# EAGLE board statie meteo (modul I) (EAGLE 7.5.0)
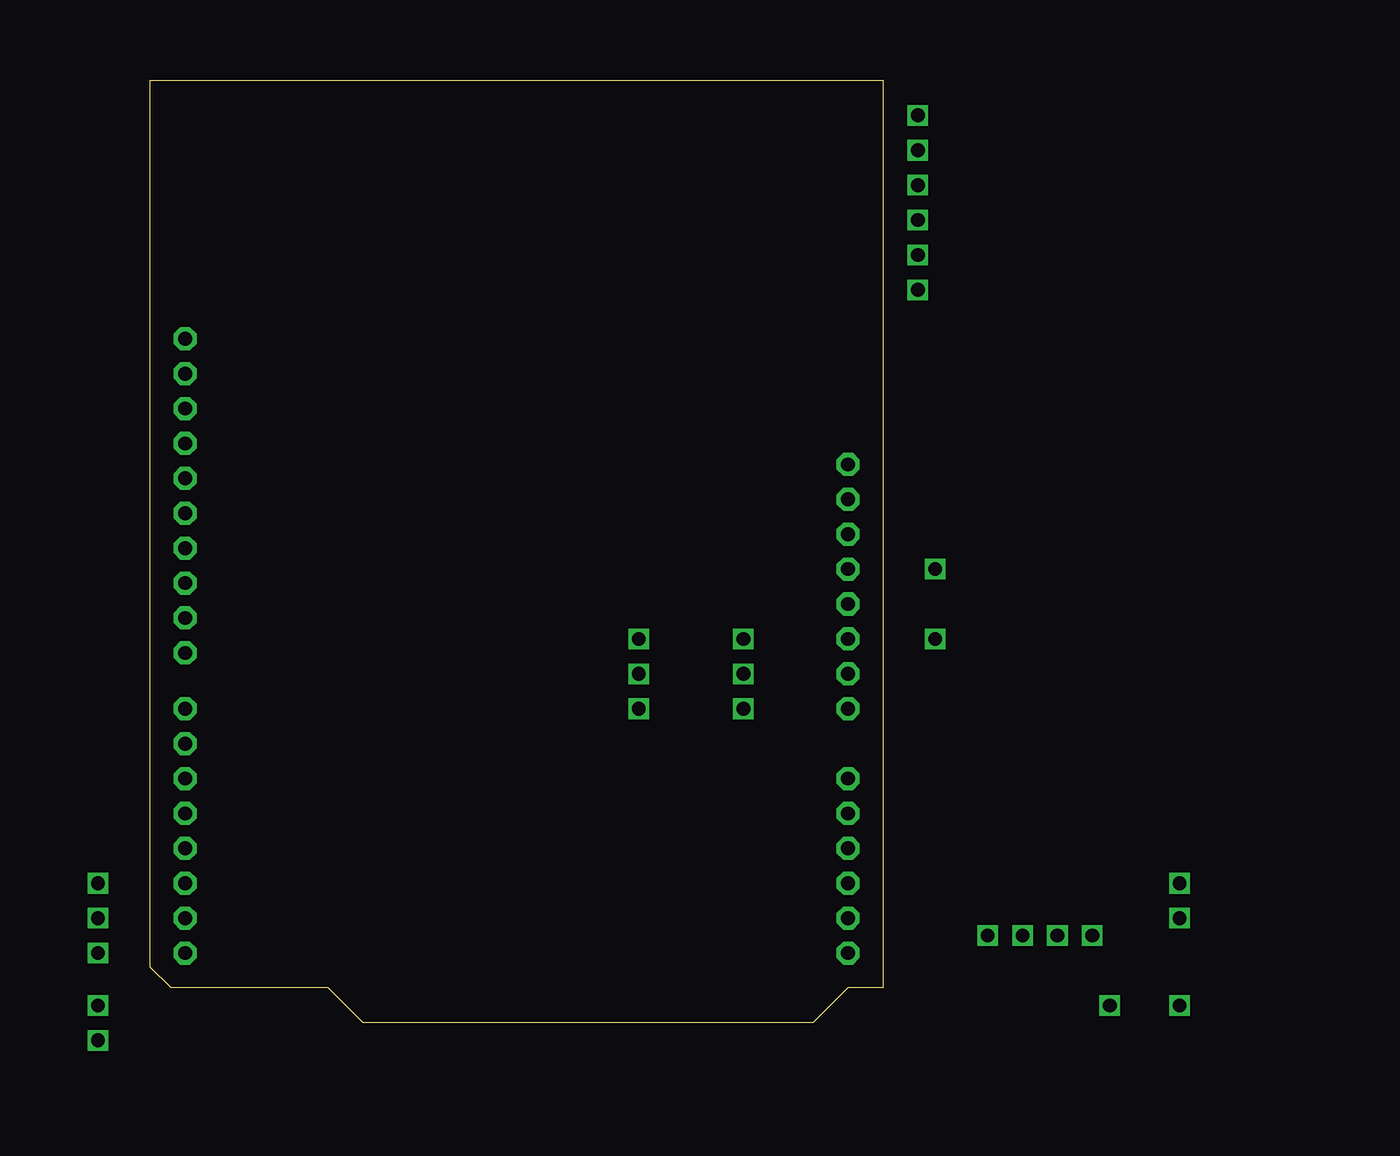
[diagram p0: board, top side]
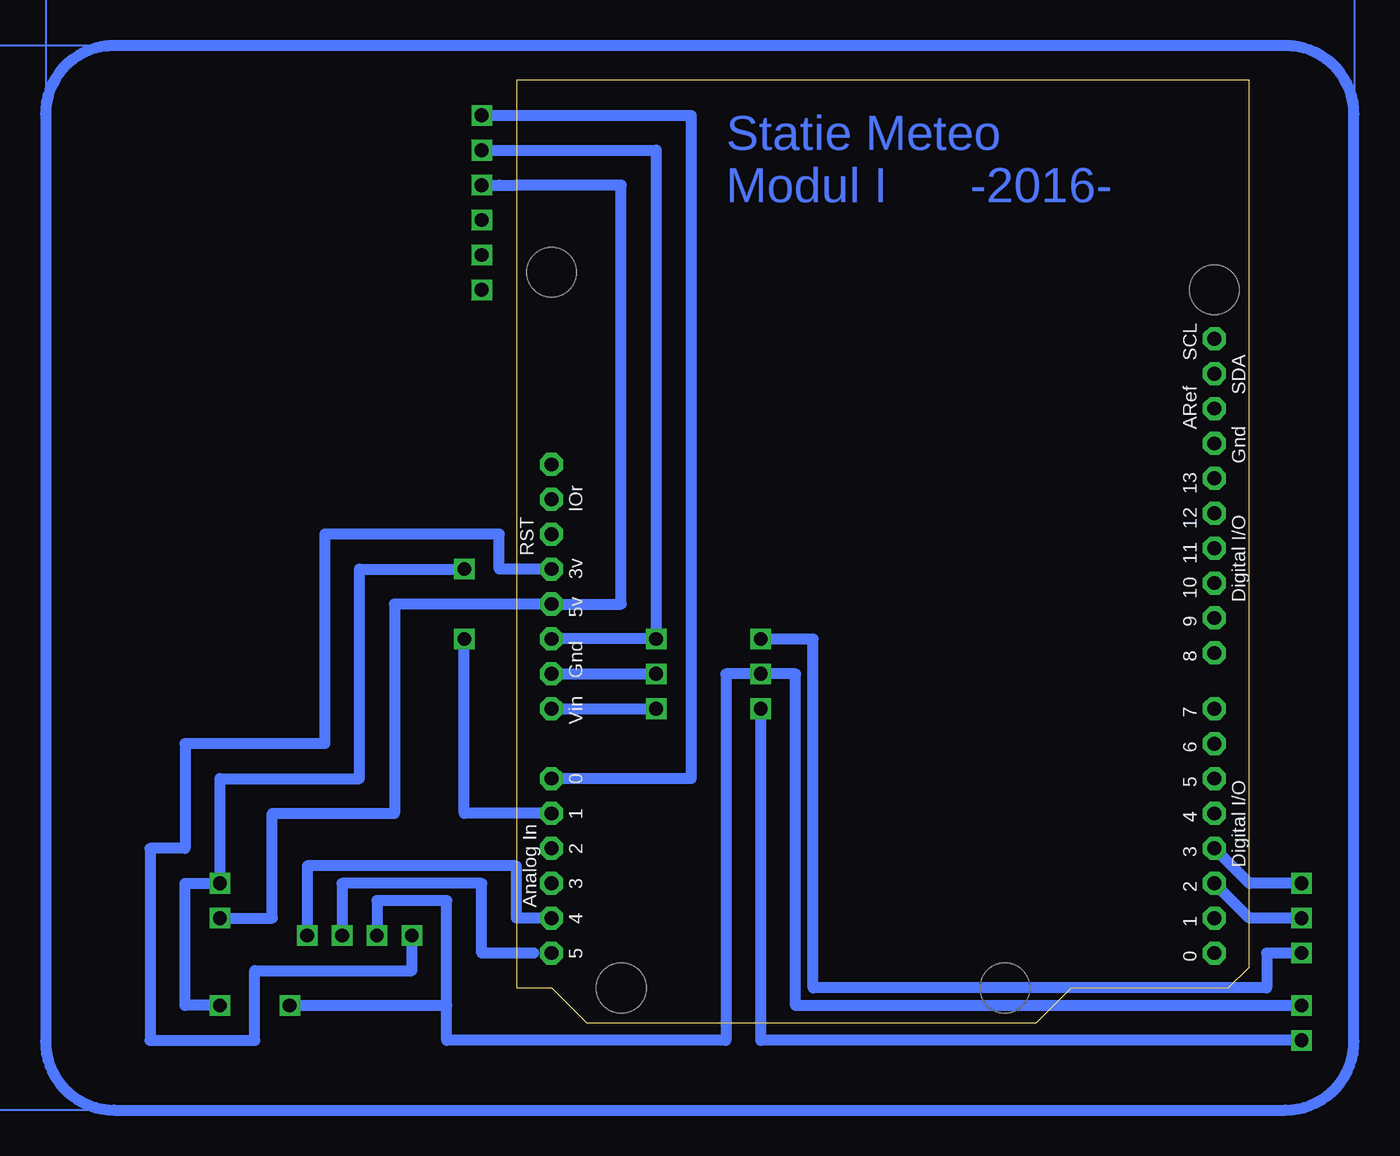
[diagram p1: board, bottom side, seen from below]

Size 53.34 x 68.58 mm. Coordinates in mm from the lower left corner, seen from the top.
Copper layers (1*16): Top 0.035mm / dielectric 1.5mm / Bottom 0.035mm
Design rules "default": minimum track width 10mil, minimum drill 24mil, track to track 8mil, track to pad 8mil, pad to pad 8mil, via to via 8mil, smd to smd 8mil, copper to edge 40mil, drill to drill 8mil, minimum pad ring 10mil, minimum via ring 8mil, stop-mask expansion 4mil, vias tented up to drill 0mil, thermal gap 10mil

## Footprints (pad centres in the part's own frame; a part is rotated, then mirrored left to right if it is on the bottom)
ARDUINOR3 = drill 1 pad 1.676 octagon: 3V 35.56,2.54; 5V 38.1,2.54; A0 50.8,2.54; A1 53.34,2.54; A2 55.88,2.54; A3 58.42,2.54; A4 60.96,2.54; A5 63.5,2.54; AREF 23.876,50.8; D0 63.5,50.8; D1 60.96,50.8; D2 58.42,50.8; D3 55.88,50.8; D4 53.34,50.8; D5 50.8,50.8; D6 48.26,50.8; D7 45.72,50.8; D8 41.656,50.8; D9 39.116,50.8; D10 36.576,50.8; D11 34.036,50.8; D12 31.496,50.8; D13 28.956,50.8; GND 26.416,50.8; GND1 43.18,2.54; GND2 40.64,2.54; IOREF 30.48,2.54; RESERVED 27.94,2.54; RESET 33.02,2.54; SCL 18.796,50.8; SDA 21.336,50.8; VIN 45.72,2.54

## Placement (x,y rotation side)
E$1  [ARDUINOR3]  53.34,68.58 270 bottom

## Library data of the parts
E$1 = adafruit

## Nets
S$1: E$1.A1
S$4: E$1.A4
S$6: E$1.3V
S$11: E$1.D2
S$12: E$1.D3
S$16: E$1.5V
S$17: E$1.GND2
S$18: E$1.A0
S$19: E$1.VIN
S$21: E$1.GND1

## Tracks (layer width: path | path; a pad name or v marks a point on that pad's centre or on a via)
S$1  (via drill 1)
  Bottom 0.813: E$1.A1 57.15,15.24 v57.15,27.94
S$2  (via drill 1)
  Bottom 0.813: 52.07,5.08 55.88,5.08 55.88,10.16 66.04,10.16 v66.04,6.35
S$4  (via drill 1)
  Bottom 0.813: E$1.A4 53.34,7.62 53.34,11.43 68.58,11.43 v68.58,6.35
S$5  (via drill 1)
  Bottom 0.813: v74.93,1.27 77.47,1.27 77.47,10.16 v74.93,10.16 74.93,17.78 64.77,17.78 64.77,33.02 v57.15,33.02
S$6  (via drill 1)
  Bottom 0.813: E$1.3V 54.61,33.02 54.61,35.56 67.31,35.56 67.31,20.32 77.47,20.32 77.47,12.7 80.01,12.7 80.01,-1.27 72.39,-1.27 72.39,3.81 60.96,3.81 v60.96,6.35
S$7  (via drill 1)
  Bottom 0.813: v-3.81,-1.27 35.56,-1.27 v35.56,22.86
S$8  (via drill 1)
  other vias: -3.81,1.27
S$9
  Bottom 0.813: 82.63,-6.35 -2.62,-6.35 arc-90 -7.62,-1.35 -7.62,66.12 arc-90 -2.62,71.12 82.63,71.12 arc-90 87.63,66.12 87.63,-1.35 arc-90 82.63,-6.35
S$10  (via drill 1)
  Bottom 0.813: v-3.81,5.08 -1.27,5.08 -1.27,2.54 31.75,2.54 31.75,27.94 v35.56,27.94
S$11  (via drill 1)
  Bottom 0.813: v-3.81,7.62 0,7.62 E$1.D2
S$12  (via drill 1)
  Bottom 0.813: v-3.81,10.16 0,10.16 E$1.D3
S$13  (via drill 1)
  other vias: 55.88,53.34
S$14  (via drill 1)
  other vias: 55.88,55.88
S$15  (via drill 1)
  other vias: 55.88,58.42
S$16  (via drill 1)
  Bottom 0.813: v74.93,7.62 71.12,7.62 71.12,15.24 62.23,15.24 62.23,30.48 E$1.5V 45.72,30.48 45.72,60.96 53.34,60.96 54.61,60.96 v55.88,60.96
S$17  (via drill 1)
  Bottom 0.813: v55.88,63.5 43.18,63.5 v43.18,27.94 E$1.GND2
S$18  (via drill 1)
  Bottom 0.813: v55.88,66.04 40.64,66.04 40.64,17.78 E$1.A0
S$19  (via drill 1)
  Bottom 0.813: E$1.VIN v43.18,22.86
S$21  (via drill 1)
  Bottom 0.813: E$1.GND1 v43.18,25.4
S$23  (via drill 1)
  Bottom 0.813: -3.81,1.27 33.02,1.27 33.02,25.4 v35.56,25.4 38.1,25.4 38.1,-1.27 58.42,-1.27 58.42,1.27 | v63.5,6.35 63.5,8.89 58.42,8.89 58.42,1.27 | v69.85,1.27 58.42,1.27
(copper drawn outside any net)
  shapes: Bottom area x2

## Text on the board
Bottom: Statie Meteo | -2016- | Modul I